# Altium PCB 主板-20190829.PcbDoc (part 6 of 6)
Units mm, origin at the board's own origin, x right, y up, seen from the top; angles counter-clockwise.
Board outline 97.69 x 103.45 mm, 2 copper layers (Top Layer, Bottom Layer); 77 components, 70 nets, 247 pads, 251 vias.
Unrouted connection lines stored in the file: 4.
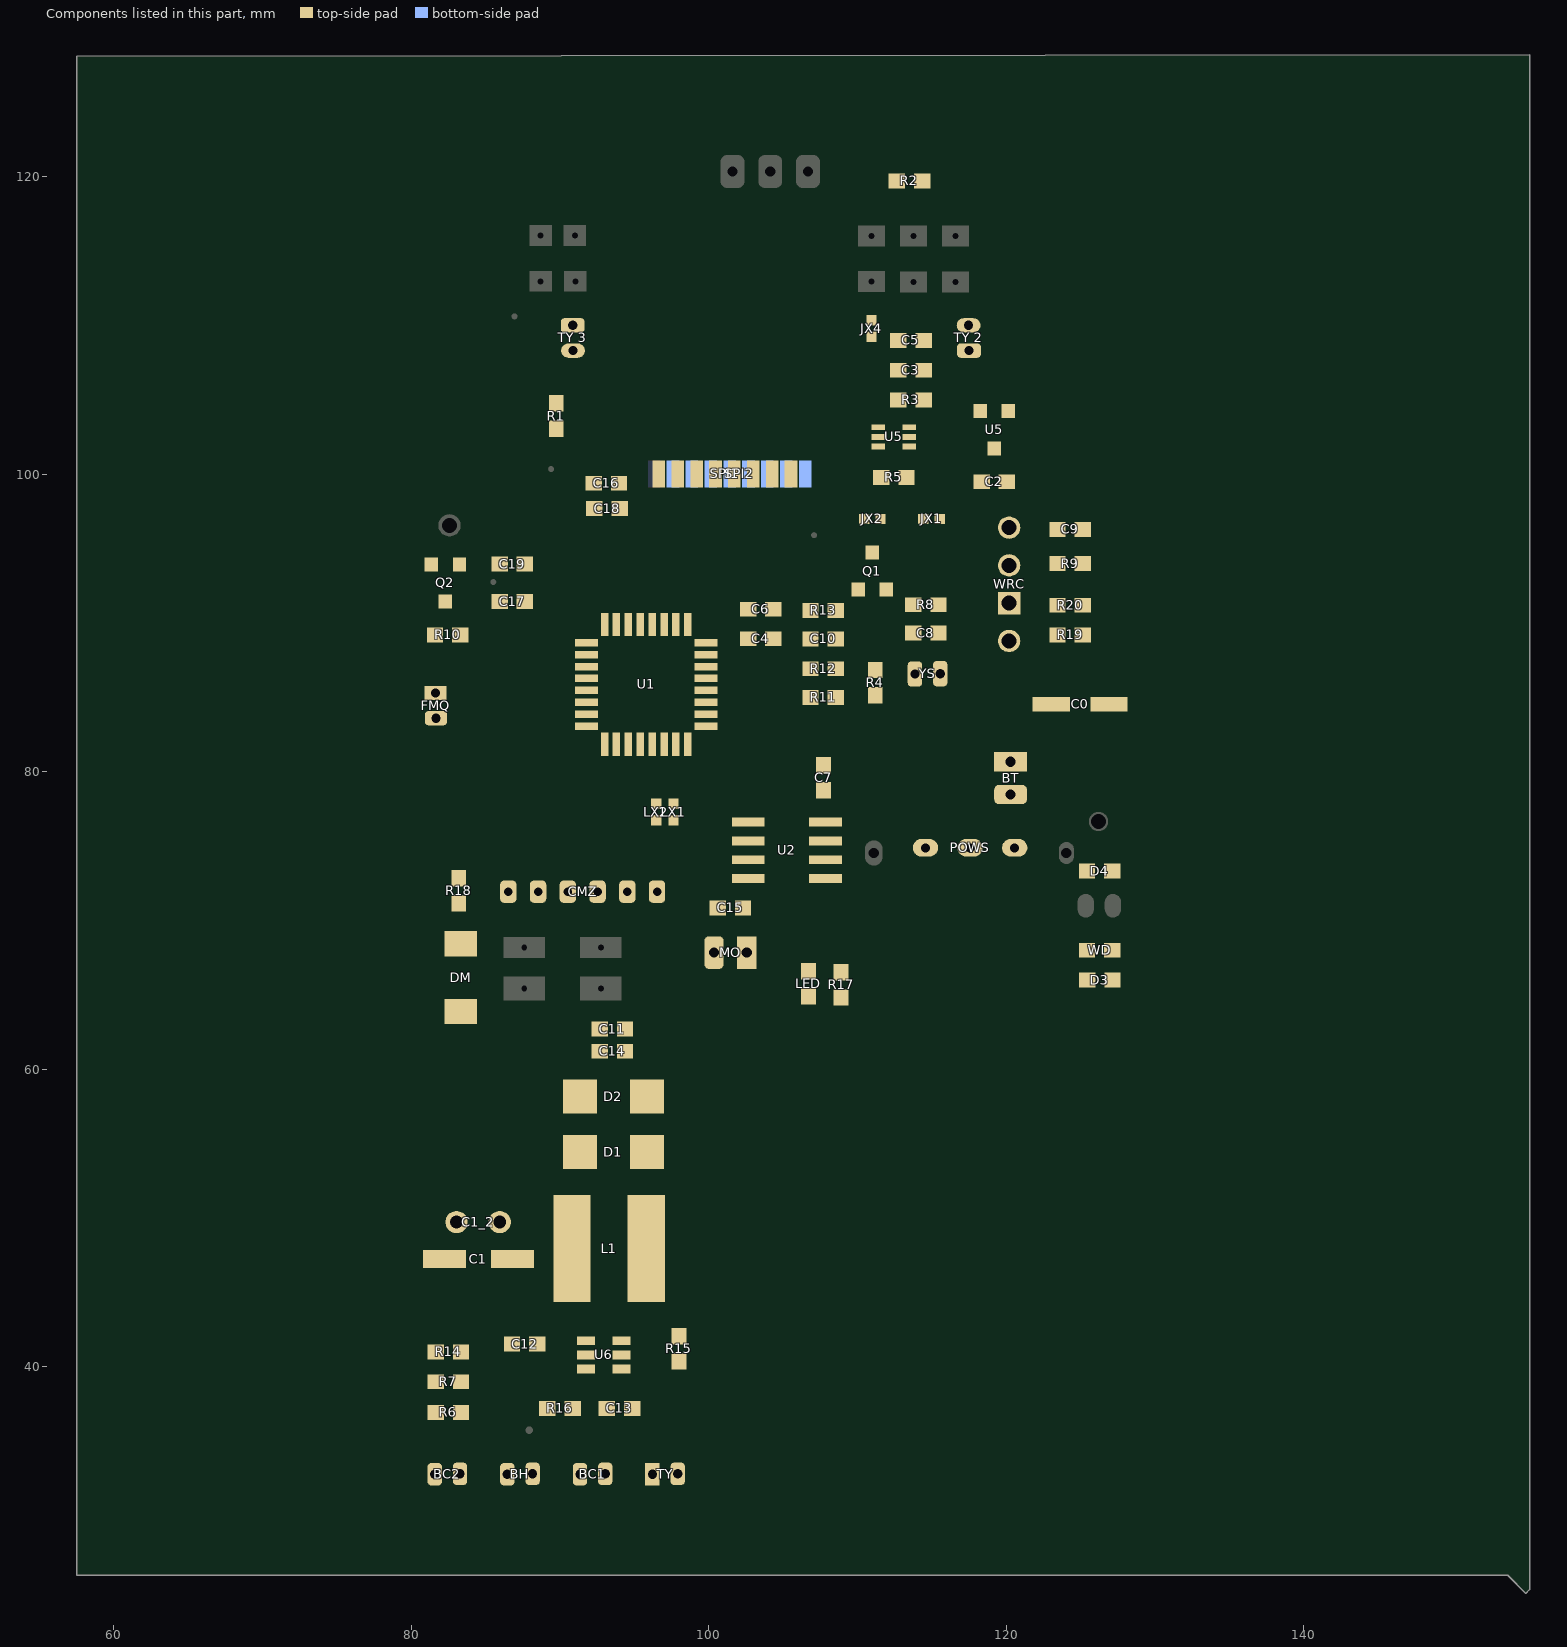
[diagram p6: the components of this part, seen from the top]

## Silkscreen, mask and mechanical layers (free items; w line width, h text height) (continued)
Bottom Overlay:
  lines w0.16: 95.021,101.776 95.021,105.181 ; 96.19,95.301 96.19,93.32 96.317,93.193 105.029,93.193 105.105,93.269 105.105,95.199 ; 97.46,95.199 97.46,93.751 97.485,93.726 106.553,93.726 106.655,93.828 106.655,95.352 ; 98.6,70.028 98.6,63.119 104.369,63.119 104.369,69.875 104.521,70.028 98.628,70.028 ; 106.756,101.879 106.756,105.054
  lines w0.25: 96.063,101.956 96.063,105.029 ; 108.001,101.802 108.001,105.054
  text "-G" at 99.898,118.643 h1.2
  text "R-" at 110.211,118.567 h1.2
  text "HWPOW" at 109.576,116.713 h1 r90
  text "38BC2" at 91.999,116.662 h1
  text "GND" at 119.609,115.976 h1 r90
  text "38BC1" at 92.939,113.436 h1 r90
  text "38OUT" at 87.638,113.386 h1 r90
  text "FL" at 114.427,110.414 h1.2
  text "IRQ" at 97.917,98.171 h0.9 r90
  text "CE" at 104.394,98.146 h0.9 r90
  text "SCK" at 101.752,98.12 h0.9 r90
  text "CSN" at 103.022,98.12 h0.9 r90
  text "GND" at 106.985,98.095 h0.9 r90
  text "GND" at 96.622,98.069 h0.9 r90
  text "3V3" at 105.664,98.069 h0.9 r90
  text "MISO" at 99.187,98.044 h0.9 r90
  text "MOSI" at 100.355,98.044 h0.9 r90
  text "3.3" at 124.067,95.958 h1
  text "GND" at 82.321,93.853 h1 r90
  text "SWIM" at 125.171,93.447 h1
  text "GND" at 124.333,90.83 h1
  text "YS" at 116.18,88.494 h1.5
  text "RST" at 124.282,88.417 h1
  text "BT" at 121.056,84.557 h1.5 r90
  text "+" at 123.215,77.521 h2
  text "BT" at 116.967,73.304 h1.2 r90
  text "8.4V" at 121.133,73.254 h1 r90
  text "MO" at 102.692,70.815 h1.5
  text "GND" at 125.552,66.446 h1 r270
  text "20190812HFCC" at 80.772,64.922 h1 r270
  text "GND" at 86.487,63.906 h1.15 r180
  text "5V" at 94.844,62.636 h1.2
  text "+" at 92.405,62.154 h2.2
  text "B1" at 93.396,34.95 h1.2
  text "BH" at 88.57,34.874 h1.2
  text "TY" at 98.577,34.849 h1.2
  text "B2" at 83.464,34.747 h1.2
Top Solder:
  lines w0.7: 100.355,72.72 100.355,75.997 101.041,76.683 103.048,76.683
  lines w1: 102.26,75.616 102.26,76.505 ; 102.286,72.949 102.286,73.889 ; 116.482,66.246 116.482,68.732